# EAGLE board controller9 (EAGLE 8.1.1)

Size 78.74 x 65 mm. Coordinates in mm from the lower left corner, seen from the top.
Outline: 0,0 25.4,0 25.4,63.5 0,63.5 0,0
Copper layers (1*16): Top 0.035mm / dielectric 1.5mm / Bottom 0.035mm
Design rules "default": minimum track width 10mil, minimum drill 24mil, track to track 8mil, track to pad 8mil, pad to pad 8mil, via to via 8mil, smd to smd 8mil, copper to edge 40mil, drill to drill 8mil, minimum pad ring 10mil, minimum via ring 8mil, stop-mask expansion 4mil, vias tented up to drill 0mil, thermal gap 10mil
Net classes: 0 default: width 0.254 mm, clearance 0.254 mm; 1 power: width 0.356 mm, clearance 0.254 mm; 2 camera_power: width 0.66 mm, clearance 0.254 mm; 3 usbsignal: width 0.254 mm, clearance 0.203 mm

## Footprints (pad centres in the part's own frame; a part is rotated, then mirrored left to right if it is on the bottom)
WS2812B = smd 1.651 x 1: 1 -2.577,1.6; 2 -2.577,-1.6; 3 2.577,-1.6; 4 2.577,1.6
SO08 = smd 0.61 x 2.21: 1 -1.905,-2.616; 2 -0.635,-2.616; 3 0.635,-2.616; 4 1.905,-2.616; 5 1.905,2.616; 6 0.635,2.616; 7 -0.635,2.616; 8 -1.905,2.616
2X4 = drill 1.016 pad 1.88 octagon: 1 -3.81,-1.27; 2 -3.81,1.27; 3 -1.27,-1.27; 4 -1.27,1.27; 5 1.27,-1.27; 6 1.27,1.27; 7 3.81,-1.27; 8 3.81,1.27
1X02_LOCK = drill 1.016 pad 1.88: 1 -0.178,0; 2 2.718,0
1X24_LOCK = drill 1.016 pad 1.88: 2 -26.67,0.127; 3 -24.13,-0.127; 4 -21.59,0.127; 5 -19.05,-0.127; 6 -16.51,0.127; 7 -13.97,-0.127; 8 -11.43,0.127; 9 -8.89,-0.127; 10 -6.35,0.127; 11 -3.81,-0.127; 12 -1.27,0.127; 13 1.27,-0.127; 14 3.81,0.127; 15 6.35,-0.127; 16 8.89,0.127; 17 11.43,-0.127; 18 13.97,0.127; 19 16.51,-0.127; 20 19.05,0.127; 21 21.59,-0.127; 22 24.13,0.127; 23 26.67,-0.127; 24 29.21,0.127; 25 31.75,-0.127
AVR_ICSP = drill 1.016 pad 1.88 octagon: 1 -1.27,5.08; 2 1.27,5.08; 3 -1.27,2.54; 4 1.27,2.54; 5 -1.27,0; 6 1.27,0; 7 -1.27,-2.54; 8 1.27,-2.54; 9 -1.27,-5.08; 10 1.27,-5.08
PAD-JUMPER-2-NO_YES_SILK = smd 0.635 x 1.27: 1 -0.45,0; 2 0.45,0
SOT23-3 = smd 0.8 x 0.9: 1 -0.95,-1; 2 0.95,-1; 3 0,1.1
TO252 = smd 1 x 1.6: 1 -2.28,-4.8; 2 2.28,-4.8 | smd 5.4 x 6.2: 3 0,2.5
0805 = smd 0.8 x 1.2: 1 -0.9,0; 2 0.9,0
1206 = smd 1.6 x 1.8: 1 -1.4,0; 2 1.4,0
1X05_LOCK = drill 1.016 pad 1.88: 1 0,0.127; 2 2.54,-0.127; 3 5.08,0.127; 4 7.62,-0.127; 5 10.16,0.127
TACTILE-PTH = drill 1.016 pad 1.88: 1 -3.251,2.261; 2 3.251,2.261; 3 -3.251,-2.261; 4 3.251,-2.261
SHORT_TOP-50 = smd 1.27 x 1.27: 1 0.635,0; 2 -0.635,0
TO-92 = drill 0.813 pad 1.88: 1 -1.27,0; 2 0,1.905; 3 1.27,0
PAD.03X.05 = smd 1.27 x 1.27: P$1 0,0
PIZERO_THOUGH_HOLE = drill 1.016 square: 1 8.34,25.15 | drill 1.016 octagon: 2 8.34,27.69; 3 10.88,25.15; 4 10.88,27.69; 5 13.42,25.15; 6 13.42,27.69; 7 15.96,25.15; 8 15.96,27.69; 9 18.5,25.15; 10 18.5,27.69; 11 21.04,25.15; 12 21.04,27.69; 13 23.58,25.15; 14 23.58,27.69; 15 26.12,25.15; 16 26.12,27.69; 17 28.66,25.15; 18 28.66,27.69; 19 31.2,25.15; 20 31.2,27.69; 21 33.74,25.15; 22 33.74,27.69; 23 36.28,25.15; 24 36.28,27.69; 25 38.82,25.15; 26 38.82,27.69; 27 41.36,25.15; 28 41.36,27.69; 29 43.9,25.15; 30 43.9,27.69; 31 46.44,25.15; 32 46.44,27.69; 33 48.98,25.15; 34 48.98,27.69; 35 51.52,25.15; 36 51.52,27.69; 37 54.06,25.15; 38 54.06,27.69; 39 56.6,25.15; 40 56.6,27.69 | hole 2.8: 3.5,3.5; 3.5,26.5; 61.5,26.5; 61.5,3.5
1501_05 = drill 1.1 pad 1.4 long: 1 -1.9,-8.5; 2 0,-11.5; 3 1.9,-8.5 | hole 1.2: -2,-3.75; 2,-3.75

## Placement (x,y rotation side)
D2  [WS2812B]  7.62,3.81 270 top
IC1  ILD213T  [SO08]  15.24,36.83 180 top
IC2  ILD213T  [SO08]  15.24,45.72 180 top
J2  [2X4]  11.43,24.13 180 top
J7  [1X02_LOCK]  13.97,60.96 180 top
J8  [1X24_LOCK]  2.54,29.21 90 top
J9  [1X02_LOCK]  21.59,55.88 90 top
J13  [AVR_ICSP]  17.78,3.81 270 top
JP1  [PAD-JUMPER-2-NO_YES_SILK]  32.38,27.94 0 top
Q1  2.5A/30V  [SOT23-3]  21.59,17.78 90 top
Q2  200mA/50V  [SOT23-3]  17.78,17.14 90 top
Q3  [TO252]  13.97,54.61 270 top
R1  1k  [0805]  6.35,55.88 90 top
R5  [0805]  12.7,8.89 90 top
R10  [0805]  7.62,30.48 0 top
R13  [1206]  17.14,29.84 270 top
R15  [0805]  7.62,35.56 0 top
R17  10k  [0805]  6.35,50.8 90 top
R18  [0805]  7.62,33.02 0 top
R19  [0805]  7.62,40.64 0 top
R20  [0805]  7.62,38.1 0 top
R_LED  4.7k  [1206]  7.62,8.89 0 top
REG_3.3V  [1X05_LOCK]  21.59,21.59 90 top
REG_5V  [1X05_LOCK]  21.59,39.37 90 top
S1  TAC_SWITCHSMD  [TACTILE-PTH]  8.64,15.24 270 top
SH1  SHORT-HT5  [SHORT_TOP-50]  22.23,52.7 180 top
T_HSS  [TO-92]  22.86,77.47 0 top  (outside the outline)
TP1  [PAD.03X.05]  13.97,19.05 0 bottom
TP2  [PAD.03X.05]  16.51,19.05 0 bottom
TP3  [PAD.03X.05]  19.05,19.05 0 bottom
U$1  PIZERO_THROUGH_HOLE  [PIZERO_THOUGH_HOLE]  78.74,0 90 top
VD1  10k  [1206]  6.35,45.72 90 top
VD2  6.2k  [1206]  8.89,45.72 270 top
X1  1501_04  [1501_05]  26.67,11.43 270 top

## Library data of the parts
D2 = SparkFun-LED; PROD_ID: DIO-12503
IC1 IC2 = SparkFun-DiscreteSemi
J2 J7-J9 J13 REG_3.3V REG_5V = SparkFun-Connectors
JP1 R5 R10 R13 R15 R18-R20 TP1-TP3 VD1 VD2 = SparkFun-Passives
Q1 = SparkFun-DiscreteSemi; PROD_ID: TRANS-11308
Q2 = SparkFun-DiscreteSemi; PROD_ID: TRANS-00830
Q3 = transistor-fet
R1 R17 R_LED = SparkFun-Resistors
S1 = SparkFun-Retired
SH1 = shorts-old; BOM: no
T_HSS = SparkFun-DiscreteSemi; PROD_ID: TRANS-08447
U$1 = pizero
X1 = con-lumberg; OC_FARNELL: 1216977; OC_NEWARK: unknown

## Nets
BATT_VCC [camera_power]: J7.2 Q3.2 R17.1 REG_3.3V.3 REG_5V.3 VD1.2
BTN: J8.8 R5.2 S1.3
BUCK_EN: REG_5V.4
CAM1: J8.15 R20.1
CAM2: J8.14 R15.1
CAM3: J8.13 R18.1
CAM4: R19.1
CAM_EN: R1.1
CAM_EN1: J8.19
CAM_OUT [camera_power]: Q3.3
CAM_OUT1 [camera_power]: J9.2
CONV_5V [power]: Q1.2 R10.2 REG_5V.1
GND [power]: D2.3 IC1.2 IC1.4 IC2.2 IC2.4 J8.11 J8.24 JP1.1 Q2.3 REG_3.3V.2 REG_5V.2 S1.2 T_HSS.1 TP3.P$1
GND-ISO [power]: SH1.1 VD2.1
GNDA [camera_power]: J7.1 J9.1 SH1.2
LED: R_LED.1
N$1: J2.4 TP2.P$1
N$2: R1.2 T_HSS.2
N$3: Q3.1 R17.2 T_HSS.3
N$6: J2.6 TP1.P$1
N$7: D2.4 R_LED.2
N$12: IC2.1 R18.2
N$13: IC2.3 R19.2
N$15: IC1.3 R15.2
N$16: J2.2 R13.2
N$18: IC1.8 R13.1
N$19: IC1.1 R20.2
N$31: IC1.6 J2.1 X1.3
N$32: IC2.8 J2.3 X1.2
N$33: IC2.6 J2.5
N$34: IC1.5 IC1.7 IC2.5 IC2.7 J2.7 JP1.2 X1.1
N$35: J2.8 Q1.3
N$36: Q1.1 Q2.2 R10.1
PB_VD_DIRECT: VD1.1 VD2.2
SWITCH_USB_VCC: Q2.1
VCC [power]: D2.1 J8.23 R5.1 REG_3.3V.1
VD_DIRECT: J8.18

## Tracks (layer width: path | path; a pad name or v marks a point on that pad's centre or on a via)
BATT_VCC  (5 unrouted)
BTN  (2 unrouted)
CAM1  (1 unrouted)
CAM2  (1 unrouted)
CAM3  (1 unrouted)
CONV_5V  (2 unrouted)
GND  (13 unrouted)
GND-ISO  (1 unrouted)
GNDA  (2 unrouted)
N$1  (1 unrouted)
N$2  (1 unrouted)
N$3  (2 unrouted)
N$6  (1 unrouted)
N$7  (1 unrouted)
N$12  (1 unrouted)
N$13  (1 unrouted)
N$15  (1 unrouted)
N$16  (1 unrouted)
N$18  (1 unrouted)
N$19  (1 unrouted)
N$31  (2 unrouted)
N$32  (2 unrouted)
N$33  (1 unrouted)
N$34  (6 unrouted)
N$35  (1 unrouted)
N$36  (2 unrouted)
PB_VD_DIRECT  (1 unrouted)
VCC  (3 unrouted)

## Text on the board
tPlace: ON | OFF | 1 | + | - | + | + | - | + | 2 | - | - | compressed | time.de
bPlace: ON | OFF | +